# Altium PCB Pulse.pcbdoc
Units mil, origin at the board's own origin, x right, y up, seen from the top; angles counter-clockwise.
Board outline 2386.2 x 1989.53 mil, 4 copper layers (Top Layer, GND, VDD3V3, Bottom Layer), stack 38.584 mil thick; 69 components, 63 nets, 307 pads, 147 vias.
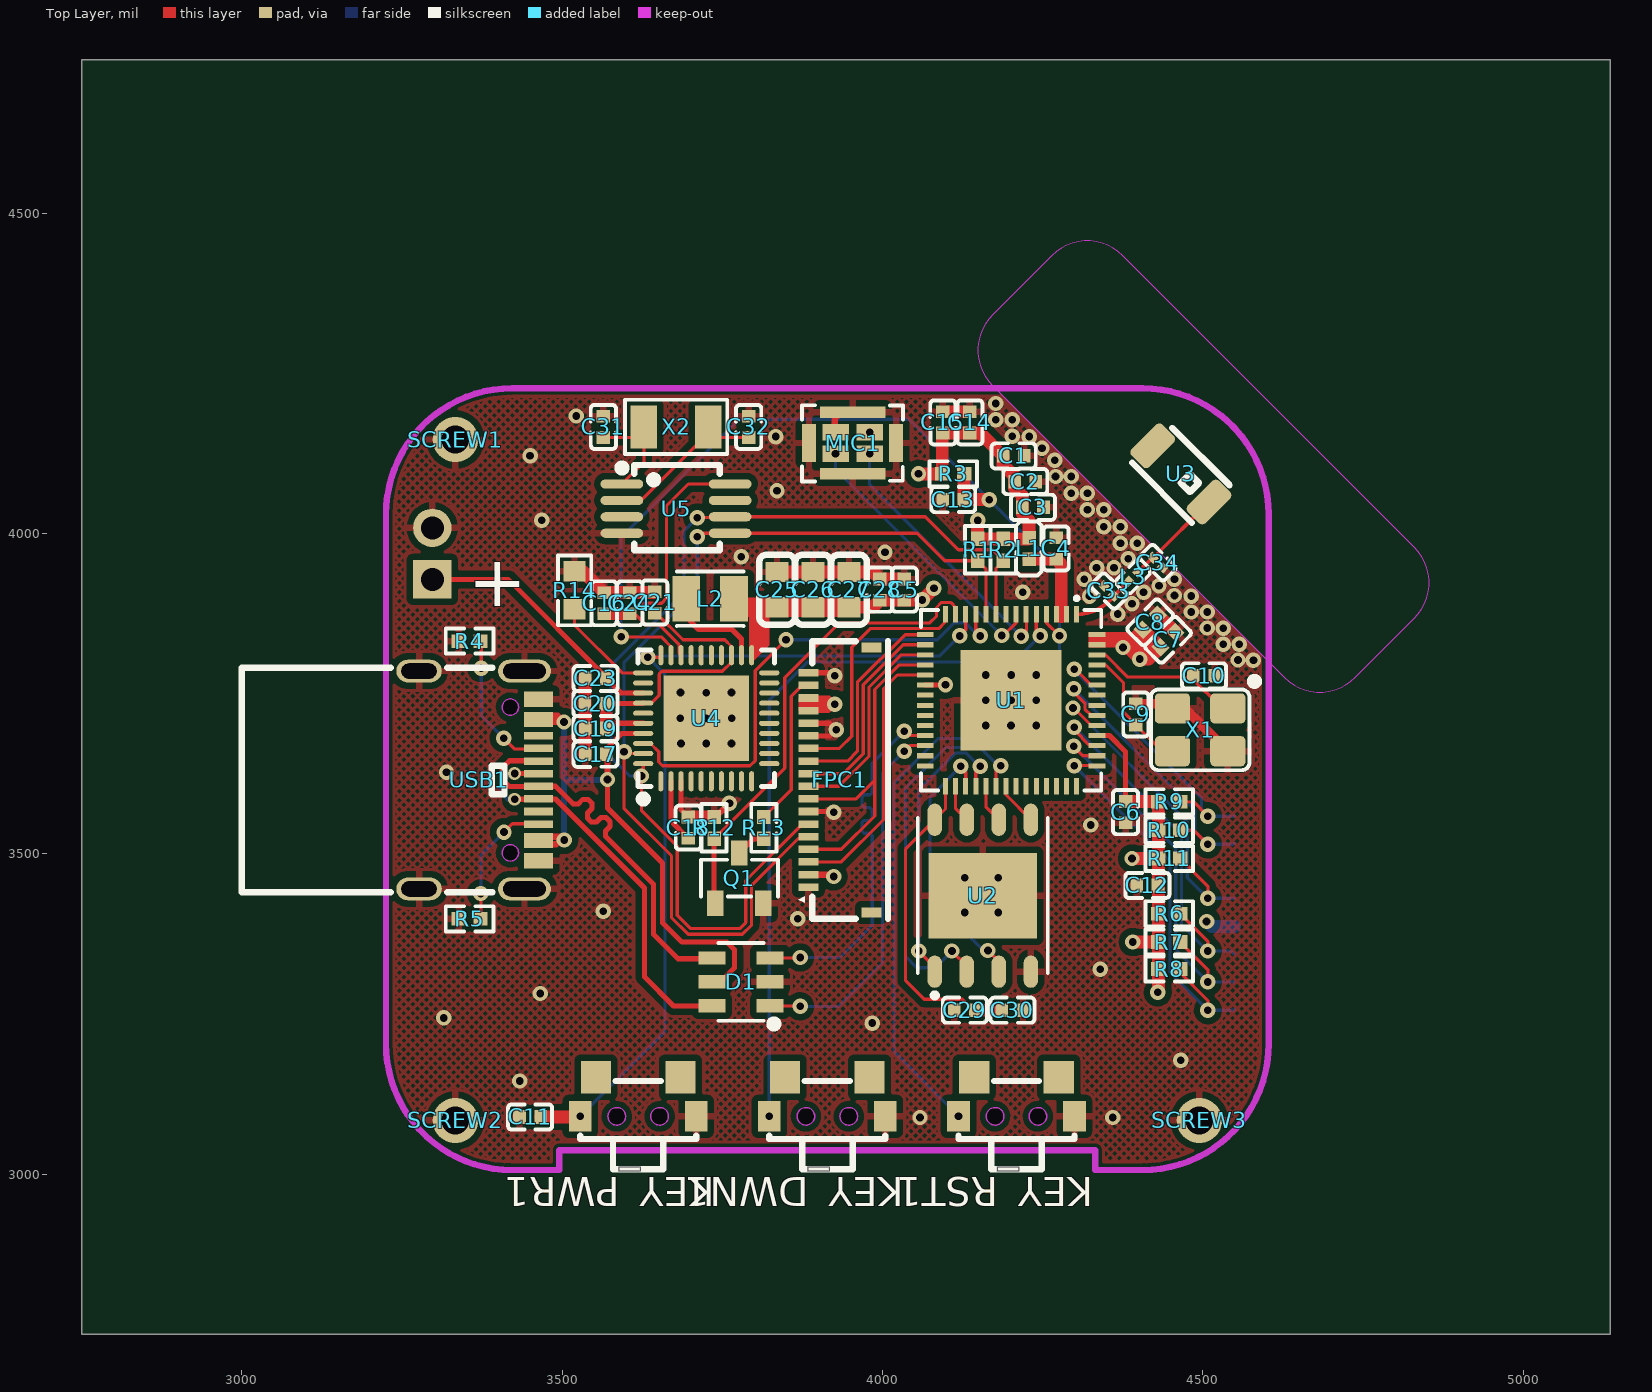
[diagram p0: Top Layer view]
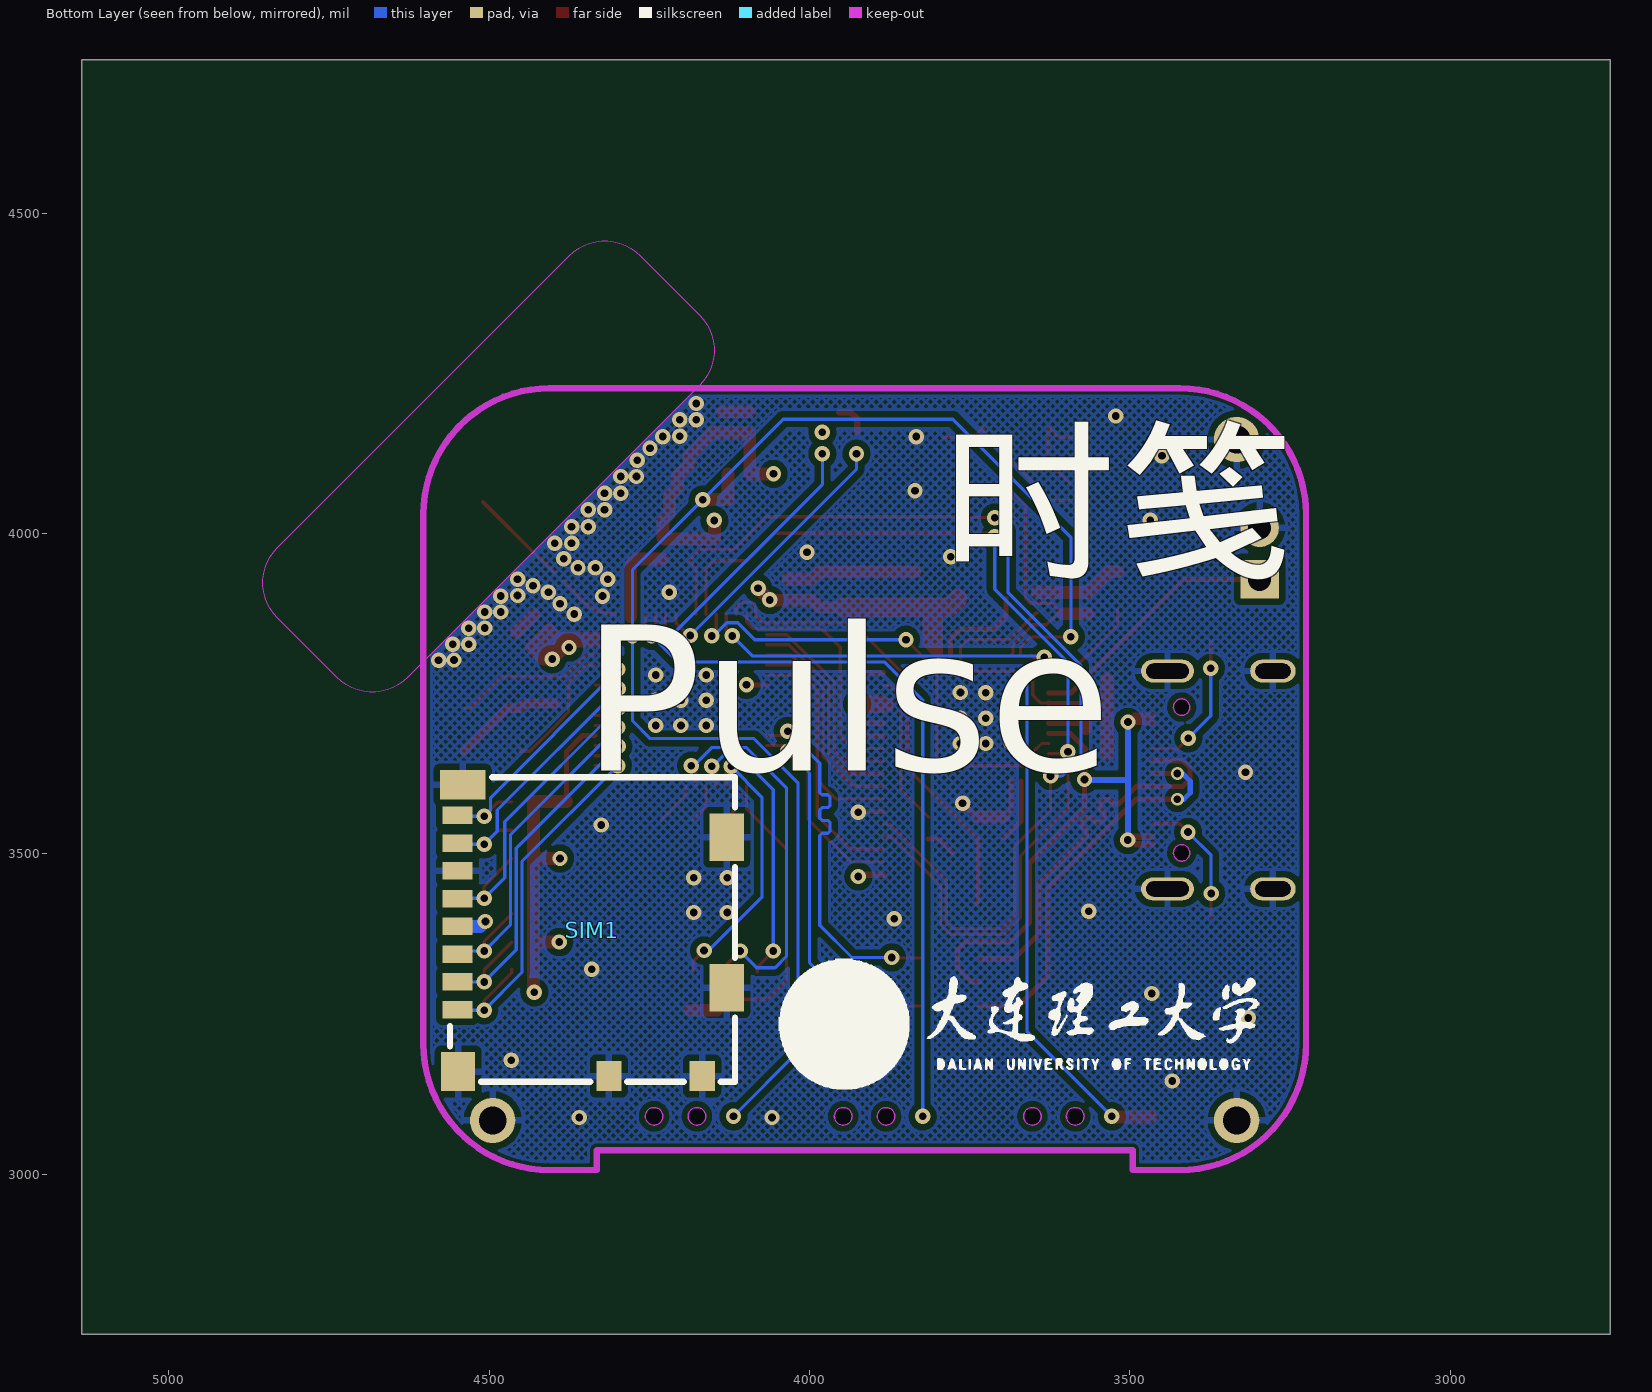
[diagram p1: Bottom Layer view, seen from below]
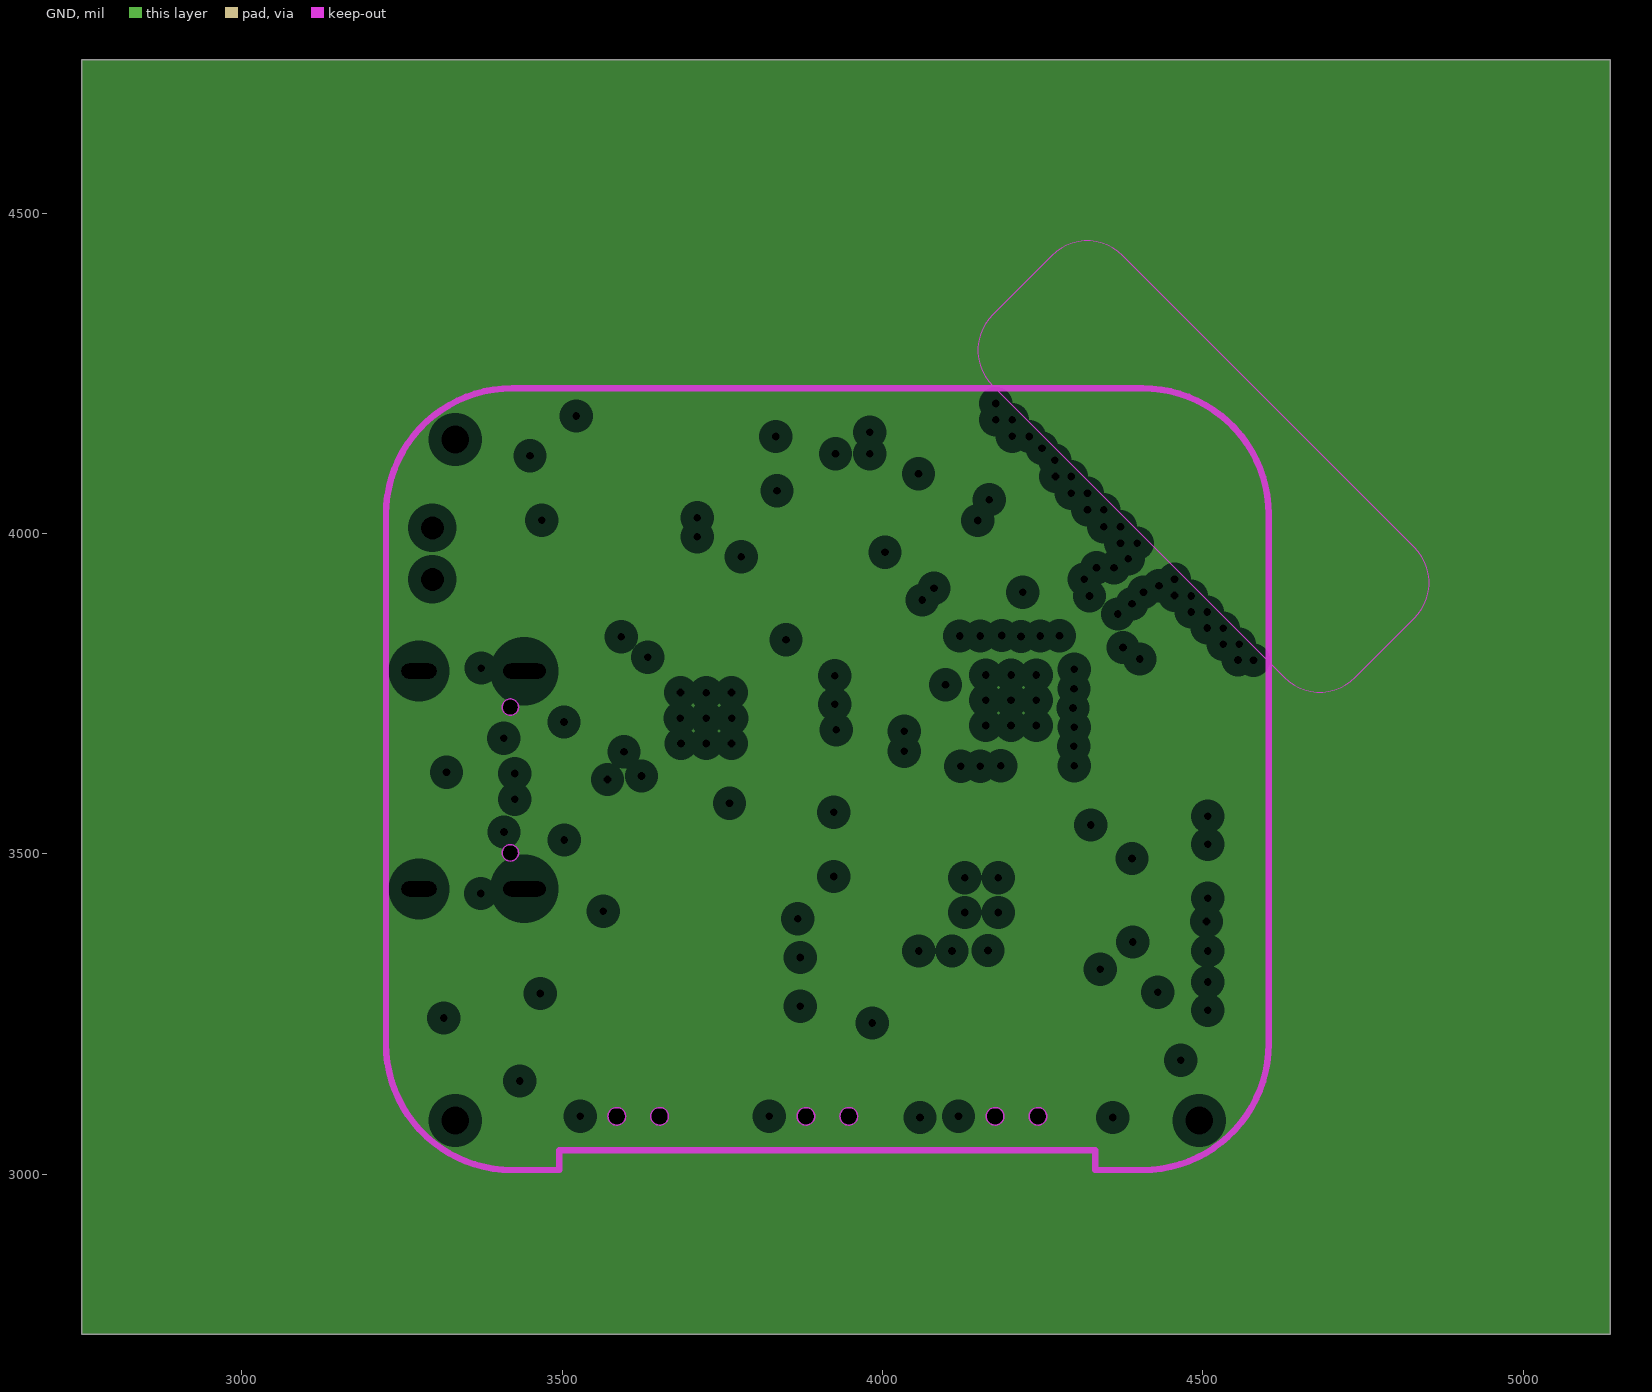
[diagram p2: GND, clearances drawn from the general rule]
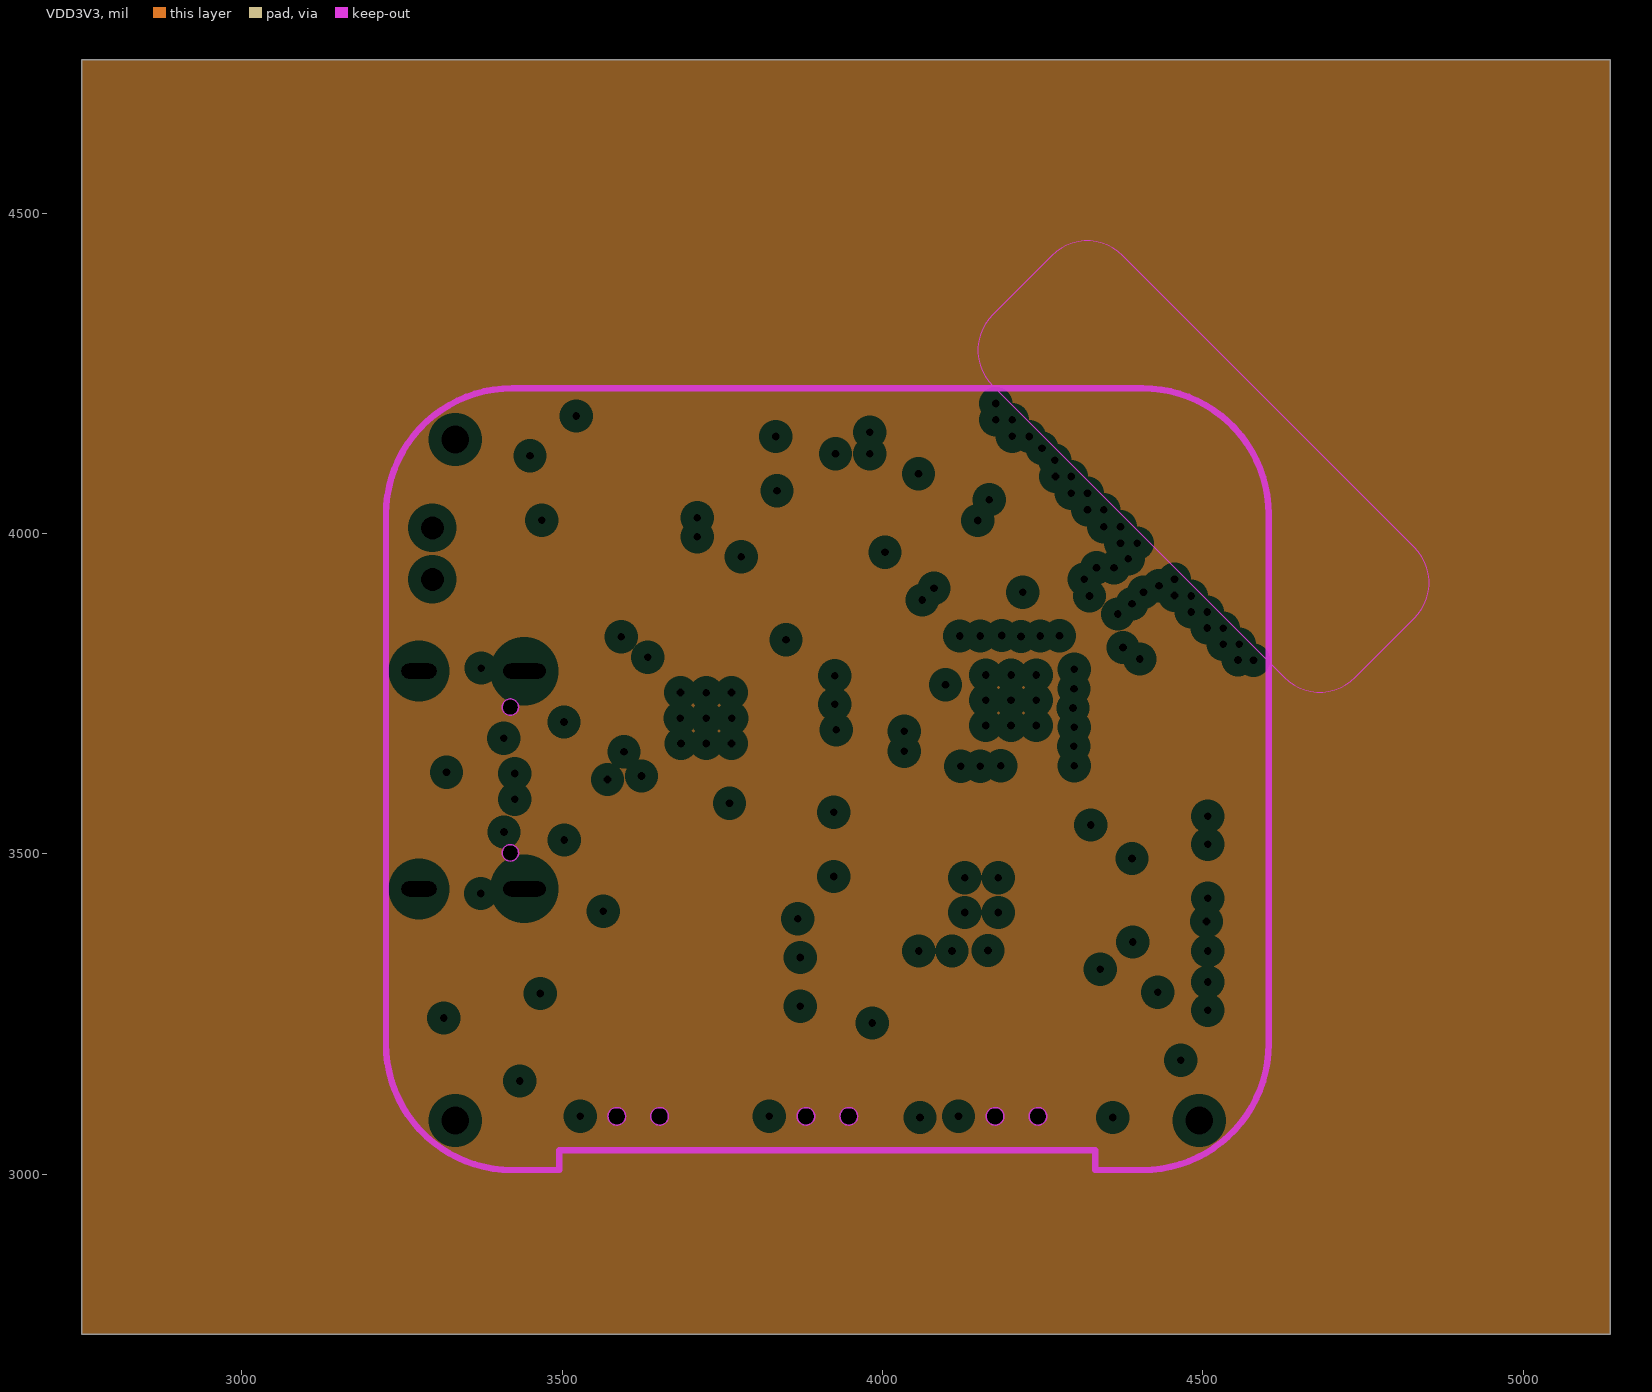
[diagram p3: VDD3V3, clearances drawn from the general rule]

## Layer stack, top to bottom
Top Solder Mask Layer: solder mask 0.394, Dk 0
Top Layer: signal copper 1.378
Dielectric1: surface 11.024, 3313 RC57% 4.2mil, Dk 0
GND: plane copper 1.378
Dielectric2: surface 11.024, 1.3mm H/HOZ Copper, Dk 0
VDD3V3: plane copper 1.378
Dielectric3: surface 11.024, 3313 RC57% 4.2mil, Dk 0
Bottom Layer: signal copper 1.378
Bottom Solder Mask Layer: solder mask 0.394, Dk 0

## Board outline
5136.2,2750 2750,2750 2750,4739.53 5136.2,4739.53

## Design rules (kind name [scope] priority, off if disabled: settings)
BoardOutlineClearance copperThickness1oz [All] p0: genericclearance=10 ignorepadtopadclearanceinfootprint=FALSE except(0: Arc-SplitContinuation Track-SplitContinuation SMDPad-SplitContinuation THPad-SplitContinuation Via-SplitContinuation Fill-SplitContinuation Poly-SplitContinuation Region-SplitContinuation Text-SplitContinuation)
BoardOutlineClearance copperThickness2oz [All] p0: genericclearance=10 ignorepadtopadclearanceinfootprint=FALSE except(0: Arc-SplitContinuation Track-SplitContinuation SMDPad-SplitContinuation THPad-SplitContinuation Via-SplitContinuation Fill-SplitContinuation Poly-SplitContinuation Region-SplitContinuation Text-SplitContinuation)
BoardOutlineClearance otherClearance [All] p0: genericclearance=10 ignorepadtopadclearanceinfootprint=FALSE except(0: Arc-SplitContinuation Track-SplitContinuation SMDPad-SplitContinuation THPad-SplitContinuation Via-SplitContinuation Fill-SplitContinuation Poly-SplitContinuation Region-SplitContinuation Text-SplitContinuation)
Clearance copperThickness1oz [All] p1: gap=7 ignorepadtopadclearanceinfootprint=FALSE
Clearance copperThickness2oz [All] p1: gap=7 ignorepadtopadclearanceinfootprint=FALSE
Clearance otherClearance [All] p1: gap=7 ignorepadtopadclearanceinfootprint=FALSE
DiffPairsRouting differentialPair [All] p1: maxuncoupledlength=10 minlimit=6 maxlimit=Infinity mostfreqgap=6 toplayer_minwidth=5 toplayer_prefwidth=10 toplayer_maxwidth=100 bottomlayer_minwidth=5 bottomlayer_prefwidth=10 bottomlayer_maxwidth=100
PasteMaskExpansion pasteMaskExpansion [All] p1: expansion=0
PlaneConnect innerPlane [All] p1: planeconnectstyle=Relief reliefexpansion=20 reliefentries=4 reliefconductorwidth=10 reliefairgap=10
PolygonConnect copperRegion [All] p1: connectstyle=Relief reliefentries=4 reliefconductorwidth=10 polygonreliefangle="90 Angle" airgapwidth=10
RoutingVias viaSize [All] p1: viastyle="Through Hole" holewidth=12.0078 minholewidth=11.811 maxholewidth=248.0314 width=12.0078 minwidth=11.811 maxwidth=248.0314
SolderMaskExpansion solderMaskExpansion [IsVia] p1: useseparateexpansions=TRUE expansion=-1000 expansionbottom=-1000
SolderMaskExpansion solderMaskExpansion [All] p2: useseparateexpansions=TRUE expansion=2 expansionbottom=2
Width copperThickness1oz [All] p1: maxlimit=100 minlimit=5 preferedwidth=10
Width copperThickness2oz [All] p1: maxlimit=100 minlimit=8 preferedwidth=10

## Components (designator, comment, footprint, x,y, rotation, side; value= is the part's Value field where it differs from the comment)
C1 "10uF" C0402 4204.84,4121.12 r180 top
C2 "1uF" C0402 4222.92,4080.96 r180 top
C3 "100nF" C0402 4234.96,4040.81 r180 top
C4 "100nF" C0402 4271.1,3976.55 r270 top
C5 "100nF" C0402 4034.18,3912.3 r270 top
C6 "100nF" C0402 4379.53,3564.94 r90 top
C7 "1uF" C0402 4445.79,3833.99 r225 top
C8 "10nF" C0402 4418.21,3861.28 r225 top
C9 "22pF" C0402 4395.59,3717.54 r90 top
C10 "22pF" C0402 4502.01,3777.77 r180 top
C11 "100nF" C0402 3449.88,3089.07 r0 top
C12 "100nF" C0402 4413.66,3450.49 r0 top
C13 "100nF" C0402 4110.47,4052.85 r0 top
C14 "10uF" C0402 4136.58,4173.33 r270 top
C15 "100nF" C0402 4094.41,4173.33 r270 top
C16 "100nF" C0402 3565.49,3891.06 r270 top
C17 "10uF" C0402 3552.29,3655.29 r0 top
C18 "1uF" C0402 3696.85,3540.84 r270 top
C19 "1uF" C0402 3552.29,3695.45 r0 top
C20 "1uF" C0402 3551.87,3734.4 r0 top
C21 "1uF" C0402 3644.65,3892.22 r270 top
C23 "1uF" C0402 3552.29,3773.76 r0 top
C24 "1uF" C0402 3605.65,3891.06 r270 top
C25 "22uF" C0603 3835.4,3912.3 r270 top
C26 "22uF" C0603 3891.62,3912.3 r270 top
C27 "22uF" C0603 3947.84,3912.3 r270 top
C28 "100nF" C0402 3996.03,3912.3 r270 top
C29 "100nF" C0402 4128.55,3255.73 r0 top
C30 "1uF" C0402 4202.84,3255.73 r180 top
C31 "18pF" C0402 3564.33,4166.32 r270 top
C32 "18pF" C0402 3791.22,4166.32 r270 top
C33 "1.2pF" C0201 4353.43,3910.29 r315 top
C34 "1.8pF" C0201 4429.73,3954.47 r135 top
D1 "" SOT-23-6_L2.9-W1.6-P0.95-LS2.8-BL 3779.18,3299.9 r90 top
FPC1 "HC-FPC-05-09-18RLTAG" FPC-SMD_18P-P0.50_HC-FPC-05-09-18RLTAG 3933.66,3615.14 r270 top
KEY_DWN1 "TS24CA" SW-SMD_TS24CA 3913.98,3120.56 r180 top
KEY_PWR1 "TS24CA" SW-SMD_TS24CA 3618.7,3120.56 r180 top
KEY_RST1 "TS24CA" SW-SMD_TS24CA 4209.25,3120.56 r180 top
L1 "2nH" L0402 4228.94,3976.55 r270 top
L2 "1uH" IND-SMD_L2.5-W2.0_WPN252012H 3730.99,3898.25 r0 top
L3 "2.4nH" L0201 4391.58,3932.38 r225 top
MIC1 "MSM261D4030H1CPM" MIC-SMD_8P-L4.0-W3.0_ZTS6231 3953.35,4141.2 r90 top
Q1 "AO3400A" SOT-23-3_L2.9-W1.3-P1.90-LS2.4-BR 3776.62,3461.99 r270 top
R1 "4.7kΩ" R0402 4148.62,3974.55 r90 top
R2 "4.7kΩ" R0402 4188.78,3974.55 r90 top
R3 "10kΩ" R0402 4110.47,4093.01 r180 top
R4 "" R0402 3355.51,3831.99 r180 top
R5 "" R0402 3355.51,3398.29 r180 top
R6 "10kΩ" R0402 4447.8,3406.32 r180 top
R7 "10kΩ" R0402 4447.8,3362.14 r180 top
R8 "10kΩ" R0402 4447.8,3319.98 r180 top
R9 "10kΩ" R0402 4447.8,3581 r180 top
R10 "10kΩ" R0402 4447.8,3536.83 r180 top
R11 "10kΩ" R0402 4447.8,3492.66 r180 top
R12 "10kΩ" R0402 3737.16,3540.47 r270 top
R13 "10Ω" R0402 3814.77,3540.3 r90 top
R14 "NCP18XH103F03RB" R0603 3519.31,3911.14 r270 top
SCREW1 "" M1螺丝孔 3333.27,4146.63 r0 top
SCREW2 "" M1螺丝孔 3333.28,3083.64 r0 top
SCREW3 "" M1螺丝孔 4494.67,3083.64 r0 top
SIM1 "SDCARD-1" SIM-SMD_8P-1040310811 4339.37,3380.21 r270 bottom
U1 "ESP32-S3R8" QFN-56_L7.0-W7.0-P0.40-TL-EP4.0 4200.83,3739.62 r270 top
U2 "W25Q128JVPIQ" WSON-8_L6.0-W5.0-P1.27-BL-EP 4156.66,3434.43 r0 top
U3 "ANT3216LL00R2400A" ANT-SMD_L3.2-W1.6 4465.87,4093.01 r135 top
U4 "AXP2101" QFN-40_L5.0-W5.0-P0.40-TL-EP3.4 3724.96,3711.51 r90 top
U5 "BM8563EMA" MSOP-8_L3.0-W3.0-P0.65-LS5.0-BL 3677.76,4038.8 r270 top
USB1 "MC-121-L119" USB-C-SMD_HANBO_MC-121-L119 3370,3615.14 r270 top
X1 "40MHz" OSC-SMD_4P-L3.2-W2.5-BL_SIT8008BI 4495.99,3693.44 r180 top
X2 "32.768kHz" CRYSTAL-SMD_L3.2-W1.5-1 3677.76,4166.32 r180 top

## Footprints (in the part's own frame and the unit in brackets; to place one, negate y for a bottom-side part, rotate by r counter-clockwise, add the part's x,y. Pads: shape width x height; smd on the part's side, far side on the other; paste and mask are expansions set on the pad)
ANT-SMD_L3.2-W1.6 [mil]
  rrect40% 39.4x68.9 smd paste+0 mask+2: 1(-62.1,0) 2(62.1,0)
  silkscreen extent -66,-41 66,42
C0201 [mil]
  rect 14.51x12.76 smd paste-3937.01 mask+2: 1(-10.8,0) 2(10.8,0)
  silkscreen extent -27,-15 27,15
C0402 [mm]
  rect 0.5x0.54 smd: 1(-0.42,0) 2(0.42,0)
  silkscreen extent -0.87,-0.5 0.87,0.5
C0603 [mm]
  rect 0.8x0.9 smd: 1(-0.7,0) 2(0.7,0)
  silkscreen extent -1.39,-0.71 1.39,0.71
CRYSTAL-SMD_L3.2-W1.5-1 [mm]
  rect 1.05x1.7 smd: 1(-1.275,0) 2(1.275,0)
  silkscreen extent -2.03,-1.08 2.03,1.08
FPC-SMD_18P-P0.50_HC-FPC-05-09-18RLTAG [mm]
  rect 0.3x0.8 smd paste+0 mask+0.05: 1(4.25,-1.25) 2(3.75,-1.25) 3(3.25,-1.25) 4(2.75,-1.25) 5(2.25,-1.25) 6(1.75,-1.25) 7(1.25,-1.25) 8(0.75,-1.25) 9(0.25,-1.25) 10(-0.25,-1.25) 11(-0.75,-1.25) 12(-1.25,-1.25) 13(-1.75,-1.25) 14(-2.25,-1.25) 15(-2.75,-1.25) 16(-3.25,-1.25) 17(-3.75,-1.25) 18(-4.25,-1.25)
  rect 0.4x0.8 smd paste+0 mask+0.05: 19(-5.25,1.25) 20(5.25,1.25)
  silkscreen extent -5.5,-1.65 5.5,1.91
IND-SMD_L2.5-W2.0_WPN252012H [mm]
  rect 1.1x1.8 smd: 1(-0.95,0) 2(0.95,0)
  silkscreen extent -1.33,-1.09 1.33,1.09
L0201 [mil]
  rect 14.51x12.76 smd paste-3937.01 mask+2: 1(-10.8,0) 2(10.8,0)
  silkscreen extent -27,-15 27,15
L0402 [mm]
  rect 0.54x0.54 smd: 1(-0.42,0) 2(0.42,0)
  silkscreen extent -1.07,-0.51 1.07,0.49
M1螺丝孔 [mm]
  round 1.8 hole 1.1 copper offset 0,0 paste+0 mask+0.051: 1(0,0)
MIC-SMD_8P-L4.0-W3.0_ZTS6231 [mm]
  rect 0.65x1.05 smd paste+0 mask+0.05: 1(0.425,-0.675) 2(0.425,0.675) 3(-0.425,0.675) 4(-0.425,-0.675)
  rect 1.5x0.55 smd paste+0 mask+0.05: 5(-0.001,-1.726) 7(-0.001,1.726)
  rect 0.45x2.6 smd paste+0 mask+0.05: 6(1.226,0.001) 8(-1.226,0.001)
  silkscreen extent -1.52,-2 1.5,2
MSOP-8_L3.0-W3.0-P0.65-LS5.0-BL [mil]
  oval 14.33x66.61 smd: 1(-38.39,-84.49) 2(-12.79,-84.49) 3(12.8,-84.49) 4(38.39,-84.49) 5(38.39,84.49) 6(12.8,84.49) 7(-12.79,84.49) 8(-38.39,84.49)
  silkscreen extent -69,-90 65,68
OSC-SMD_4P-L3.2-W2.5-BL_SIT8008BI [mm]
  rrect30% 1.4x1.2 smd paste+0 mask+0.051: 1(-1.1,-0.85) 2(1.1,-0.85) 3(1.1,0.85) 4(-1.1,0.85)
  silkscreen extent -2.3,-2.07 1.96,1.6
QFN-40_L5.0-W5.0-P0.40-TL-EP3.4 [mm]
  oval 0.8x0.2 smd paste-100 mask+0.05: 1(-2.5,1.8) 2(-2.5,1.4) 3(-2.5,1) 4(-2.5,0.6) 5(-2.5,0.2) 6(-2.5,-0.2) 7(-2.5,-0.6) 8(-2.5,-1) 9(-2.5,-1.4) 10(-2.5,-1.8) 21(2.5,-1.8) 22(2.5,-1.4) 23(2.5,-1) 24(2.5,-0.6) 25(2.5,-0.2) 26(2.5,0.2) 27(2.5,0.6) 28(2.5,1) 29(2.5,1.4) 30(2.5,1.8)
  oval 0.2x0.8 smd paste-100 mask+0.05: 11(-1.8,-2.5) 12(-1.4,-2.5) 13(-1,-2.5) 14(-0.6,-2.5) 15(-0.2,-2.5) 16(0.2,-2.5) 17(0.6,-2.5) 18(1,-2.5) 19(1.4,-2.5) 20(1.8,-2.5) 31(1.8,2.5) 32(1.4,2.5) 33(1,2.5) 34(0.6,2.5) 35(0.2,2.5) 36(-0.2,2.5) 37(-0.6,2.5) 38(-1,2.5) 39(-1.4,2.5) 40(-1.8,2.5)
  rect 3.4x3.4 smd paste-100 mask+0.05: 41(0,0)
  silkscreen extent -3.35,-2.7 2.7,2.7
QFN-56_L7.0-W7.0-P0.40-TL-EP4.0 [mm]
  rect 0.665x0.2 smd paste-100 mask+0.051: 1(-3.408,2.6) 2(-3.408,2.2) 3(-3.408,1.8) 4(-3.408,1.4) 5(-3.408,1) 6(-3.408,0.6) 7(-3.408,0.2) 8(-3.408,-0.2) 9(-3.408,-0.6) 10(-3.408,-1) 11(-3.408,-1.4) 12(-3.408,-1.8) 13(-3.408,-2.2) 14(-3.408,-2.6) 29(3.408,-2.6) 30(3.408,-2.2) 31(3.408,-1.8) 32(3.408,-1.4) 33(3.408,-1) 34(3.408,-0.6) 35(3.408,-0.2) 36(3.408,0.2) 37(3.408,0.6) 38(3.408,1) 39(3.408,1.4) 40(3.408,1.8) 41(3.408,2.2) 42(3.408,2.6)
  rect 0.2x0.665 smd paste-100 mask+0.051: 15(-2.6,-3.408) 16(-2.2,-3.408) 17(-1.8,-3.408) 18(-1.4,-3.408) 19(-1,-3.408) 20(-0.6,-3.408) 21(-0.2,-3.408) 22(0.2,-3.408) 23(0.6,-3.408) 24(1,-3.408) 25(1.4,-3.408) 26(1.8,-3.408) 27(2.2,-3.408) 28(2.6,-3.408) 43(2.6,3.408) 44(2.2,3.408) 45(1.8,3.408) 46(1.4,3.408) 47(1,3.408) 48(0.6,3.408) 49(0.2,3.408) 50(-0.2,3.408) 51(-0.6,3.408) 52(-1,3.408) 53(-1.4,3.408) 54(-1.8,3.408) 55(-2.2,3.408) 56(-2.6,3.408)
  rect 4x4 smd paste-100 mask+0.051: 57(0,0)
  silkscreen extent -4.11,-3.58 3.58,3.58
R0402 [mm]
  rect 0.566x0.54 smd paste-100 mask+0.051: 1(-0.433,0) 2(0.433,0)
  silkscreen extent -0.94,-0.5 0.94,0.5
R0603 [mil]
  rect 31.75x34.02 smd paste-3937.01 mask+2: 1(-29.66,0) 2(29.66,0)
  silkscreen extent -55,-26 55,26
SIM-SMD_8P-1040310811 [mm]
  rect 0.7x1.2 smd: 1(3.138,-5.337) 2(2.037,-5.337) 3(0.938,-5.337) 4(-0.162,-5.337) 5(-1.263,-5.337) 6(-2.363,-5.337) 7(-3.462,-5.337) 8(-4.562,-5.337)
  rect 1.17x1.8 smd: 9(-5.773,-5.138)
  rect 1.55x1.35 smd: 10(5.598,-5.313)
  rect 1.2x1 smd: 11(5.773,0.663) 12(5.773,4.363)
  rect 1.9x1.35 smd: 13(2.273,5.337) 14(-3.697,5.337)
  silkscreen extent -6.07,-5.64 5.99,5.67
SOT-23-3_L2.9-W1.3-P1.90-LS2.4-BR [mm]
  rect 1x0.65 smd: 1(1,-0.95) 2(1,0.95) 3(-1,0)
  silkscreen extent -0.73,-1.53 0.73,1.53
SOT-23-6_L2.9-W1.6-P0.95-LS2.8-BL [mil]
  rect 20.95x42.2 smd: 1(-37.4,-45.24) 2(0,-45.24) 3(37.4,-45.24) 4(37.4,45.24) 5(0,45.24) 6(-37.4,45.24)
  silkscreen extent -72,-57 61,35
SW-SMD_TS24CA [mm]
  rect 0.9x1.2 smd: 1(2.3,0.775) 2(-2.3,0.775)
  rect 1.2x1.3 smd: 3(1.675,-0.775) 4(-1.675,-0.775)
  Board Outline Layer circle w0.003: c0.85,0.775 r0.35
  Board Outline Layer circle w0.003: c-0.85,0.775 r0.35
  Board Outline Layer region: 0.5,0.775 0.535,0.927 0.632,1.049 0.772,1.116 0.928,1.116 1.068,1.049 1.165,0.927 1.2,0.775 1.2,0.775 1.165,0.623 1.068,0.501 0.928,0.434 0.772,0.434 0.632,0.501 0.535,0.623 0.5,0.775
  Board Outline Layer region: 0.5,0.775 0.509,0.853 0.535,0.927 0.576,0.993 0.632,1.049 0.698,1.09 0.772,1.116 0.85,1.125 0.928,1.116 1.002,1.09 1.068,1.049 1.124,0.993 1.165,0.927 1.191,0.853 1.2,0.775 1.191,0.697 1.165,0.623 1.124,0.557 1.068,0.501 1.002,0.46 0.928,0.434 0.85,0.425 0.772,0.434 0.698,0.46 0.632,0.501 0.576,0.557 0.535,0.623 0.509,0.697
  Board Outline Layer region: -1.2,0.775 -1.165,0.927 -1.068,1.049 -0.928,1.116 -0.772,1.116 -0.632,1.049 -0.535,0.927 -0.5,0.775 -0.5,0.775 -0.535,0.623 -0.632,0.501 -0.772,0.434 -0.928,0.434 -1.068,0.501 -1.165,0.623 -1.2,0.775
  Board Outline Layer region: -1.2,0.775 -1.191,0.853 -1.165,0.927 -1.124,0.993 -1.068,1.049 -1.002,1.09 -0.928,1.116 -0.85,1.125 -0.772,1.116 -0.698,1.09 -0.632,1.049 -0.576,0.993 -0.535,0.927 -0.509,0.853 -0.5,0.775 -0.509,0.697 -0.535,0.623 -0.576,0.557 -0.632,0.501 -0.698,0.46 -0.772,0.434 -0.85,0.425 -0.928,0.434 -1.002,0.46 -1.068,0.501 -1.124,0.557 -1.165,0.623 -1.191,0.697
  Multi-Layer board cut-out: 0.5,0.775 0.535,0.927 0.632,1.049 0.772,1.116 0.928,1.116 1.068,1.049 1.165,0.927 1.2,0.775 1.2,0.775 1.165,0.623 1.068,0.501 0.928,0.434 0.772,0.434 0.632,0.501 0.535,0.623 0.5,0.775
  Multi-Layer board cut-out: -1.2,0.775 -1.165,0.927 -1.068,1.049 -0.928,1.116 -0.772,1.116 -0.632,1.049 -0.535,0.927 -0.5,0.775 -0.5,0.775 -0.535,0.623 -0.632,0.501 -0.772,0.434 -0.928,0.434 -1.068,0.501 -1.165,0.623 -1.2,0.775
  silkscreen extent -2.3,-0.62 2.3,2.88
USB-C-SMD_HANBO_MC-121-L119 [mm]
  oval 0.9x2.1 hole 0.6 slot 1.7 at 90 deg: 13(-4.32,1.807) 13(4.32,1.807)
  oval 0.9x1.8 hole 0.6 slot 1.4 at 90 deg: 13(-4.32,-2.373) 13(4.32,-2.373)
  rect 0.6x1.15 smd paste-100 mask+0.051: A1B12(-3.2,2.372) A4B9(-2.4,2.372) B1A12(3.2,2.372) B4A9(2.4,2.372)
  rect 0.3x1.15 smd paste-100 mask+0.051: A5(-1.25,2.372) A6(-0.25,2.372) A7(0.25,2.372) A8(1.25,2.372) B5(1.75,2.372) B6(0.75,2.372) B7(-0.75,2.372) B8(-1.75,2.372)
  Board Outline Layer circle w0.003: c2.89,1.248 r0.325
  Board Outline Layer circle w0.003: c-2.89,1.248 r0.325
  Board Outline Layer region: 2.89,1.573 3.031,1.54 3.144,1.45 3.207,1.32 3.207,1.175 3.144,1.045 3.031,0.955 2.89,0.923 2.89,0.923 2.749,0.955 2.636,1.045 2.573,1.175 2.573,1.32 2.636,1.45 2.749,1.54 2.89,1.573
  Board Outline Layer region: 2.89,1.573 2.968,1.563 3.041,1.535 3.105,1.491 3.157,1.432 3.194,1.363 3.213,1.287 3.213,1.208 3.194,1.132 3.157,1.063 3.105,1.004 3.041,0.96 2.968,0.932 2.89,0.923 2.812,0.932 2.739,0.96 2.674,1.004 2.622,1.063 2.586,1.132 2.567,1.208 2.567,1.287 2.586,1.363 2.622,1.432 2.674,1.491 2.739,1.535 2.812,1.563
  Board Outline Layer region: -2.89,1.573 -2.749,1.54 -2.636,1.45 -2.573,1.32 -2.573,1.175 -2.636,1.045 -2.749,0.955 -2.89,0.923 -2.89,0.923 -3.031,0.955 -3.144,1.045 -3.207,1.175 -3.207,1.32 -3.144,1.45 -3.031,1.54 -2.89,1.573
  Board Outline Layer region: -2.89,1.573 -2.812,1.563 -2.739,1.535 -2.675,1.491 -2.623,1.432 -2.586,1.363 -2.568,1.287 -2.568,1.208 -2.586,1.132 -2.623,1.063 -2.675,1.004 -2.739,0.96 -2.812,0.932 -2.89,0.923 -2.968,0.932 -3.041,0.96 -3.106,1.004 -3.158,1.063 -3.194,1.132 -3.213,1.208 -3.213,1.287 -3.194,1.363 -3.158,1.432 -3.106,1.491 -3.041,1.535 -2.968,1.563
  Multi-Layer board cut-out: 2.89,1.573 3.031,1.54 3.144,1.45 3.207,1.32 3.207,1.175 3.144,1.045 3.031,0.955 2.89,0.923 2.89,0.923 2.749,0.955 2.636,1.045 2.573,1.175 2.573,1.32 2.636,1.45 2.749,1.54 2.89,1.573
  Multi-Layer board cut-out: -2.89,1.573 -2.749,1.54 -2.636,1.45 -2.573,1.32 -2.573,1.175 -2.636,1.045 -2.749,0.955 -2.89,0.923 -2.89,0.923 -3.031,0.955 -3.144,1.045 -3.207,1.175 -3.207,1.32 -3.144,1.45 -3.031,1.54 -2.89,1.573
  silkscreen extent -4.45,-9.4 4.44,1.02
WSON-8_L6.0-W5.0-P1.27-BL-EP [mm]
  oval 0.581x1.276 smd: 1(-1.905,-3.013) 2(-0.635,-3.013) 3(0.635,-3.013) 4(1.905,-3.013) 5(1.905,3.013) 6(0.635,3.013) 7(-0.635,3.013) 8(-1.905,3.013)
  rect 4.3x3.4 smd: 9(0,0)
  silkscreen extent -2.58,-4.05 2.58,3.08

## Free pads (board coordinates)
  rect 60x60 hole 36: 1(3297.29,3928.36)
  round 60 hole 36: 1(3297.29,4008.68)

## Via types
v1: diameter 24.02, hole 12, Top Layer to Bottom Layer, 136 vias
v2: diameter 24, hole 12, Top Layer to Bottom Layer, 9 vias
v3: diameter 20, hole 12, Top Layer to Bottom Layer, 2 vias

## Nets (pads, with @x,y where several pads share a name; then routed paths per layer and width w, separated by ;. In a path a pad name is that pad's centre, name@x,y a point inside that pad or via, vN(x,y) a via of type N, cw(c..) or ccw(c..) an arc to the next point about the centre after c; other vN are vias at no path point)
$1N33: C33.2 L3.2 U1.1 | length 99.1
  Top Layer w6.2: U1.1 ccw(c4303.19,3946.2) C33.2 4383.15,3924.74 L3.2
$1N72: C4.2 L1.2 U1.2 U1.3 | length 135.4
  Top Layer w20: L1.2 C4.2 4279.14,3951.98 4279.14,3870.14
$1N124: C34.2 L3.1 U3.1 | length 155.7
  Top Layer w6.2: L3.1 4421.3,3962.1 C34.2 4422.78,3962.1 U3.1
$1N184: C32.2 U5.2 X2.1 | length 258.2
  Top Layer w5: U5.2 3623.3,4051.59 3727.95,4156.24 X2.1 3744.5,4149.78 C32.2
$1N185: C31.2 U5.1 X2.2 | length 173.4
  Top Layer w5: C31.2 3611.02,4149.78 X2.2 3627.56,4111.48 U5.1
$1N198: L2.1 U4.22 | length 154.7
  Top Layer w8: L2.1 3693.59,3869.39 3712.92,3850.06 3765.12,3850.06 3780.08,3835.1 U4.22
$1N429: Q1.3 R13.1 | length 47.2
  Top Layer w8: Q1.3 3798.52,3523.26 R13.1
$1N464: R5.1 USB1.B5 | length 212.3
  Top Layer w5: R5.1 3373.14,3398.87 v1(3373.14,3437.86) ; v1(3409.18,3533.81) 3422.24,3546.87 3464.45,3546.87 USB1.B5@3465.08,3546.24
  Bottom Layer w5: v1(3373.14,3437.86) 3373.14,3497.76 v1(3409.18,3533.81)
$1N465: R4.1 USB1.A5 | length 230.4
  Top Layer w5: R4.1 3373.58,3830.96 v1(3373.58,3789.82) ; v1(3408.68,3680.41) 3425.76,3663.33 3464.06,3663.33 USB1.A5@3465.08,3664.35
  Bottom Layer w5: v1(3373.58,3789.82) 3373.58,3715.5 v1(3408.68,3680.41)
BAT: C23.2 pad.1@3297.29,3928.36 U4.33 | length 403.7
  Top Layer w8: pad.1@3297.29,3928.36 3415.73,3928.36 3568.83,3775.27 C23.2 3591.7,3750.88 U4.33
ESP_EN: C13.2 KEY_RST1.1 R3.1 U1.4 U4.29 | length 2331
  Top Layer w5: v1(3592.02,3838.53) 3654.87,3838.53 3670.75,3822.66 3670.75,3810.85 U4.29 ; U1.4 4255.95,3860.49 v1@4276.34,3840.1
  Top Layer w20: R3.1 4127.51,4053.35 C13.2 v1(4166.69,4052.85)
  Bottom Layer w5: v1(3592.02,3838.53) 3592.02,3994.2 3776.25,4178.43 4041.12,4178.43 v1(4166.69,4052.85) 4276.43,3943.12 v1(4276.43,3840.1) 4276.43,3707.51 4248.68,3679.77 4086.76,3679.77 4018.11,3611.12 4018.11,3190.64 v1(4118.7,3090.05)
GND: C1.1 C2.1 C3.1 C4.1 C5.1 C6.1 C7.1 C8.1 C9.2 C10.1 C11.1 C12.1 C13.1 C14.1 C15.1 C16.1 C17.1 C18.1 C19.1 C20.1 C21.1 C23.1 C24.1 C25.1 C26.1 C27.1 C28.1 C29.1 C30.1 C31.1 C32.1 C33.1 C34.1 D1.2 FPC1.1 FPC1.7 FPC1.13 FPC1.14 FPC1.18 KEY_DWN1.2 KEY_PWR1.2 KEY_RST1.2 MIC1.2 MIC1.5 MIC1.6 MIC1.7 MIC1.8 pad.1@3297.29,4008.68 Q1.2 R4.2 R5.2 R12.1 R14.1 SCREW1.1 SCREW2.1 SCREW3.1 SIM1.6 SIM1.9 SIM1.10 SIM1.11 SIM1.12 SIM1.13 SIM1.14 U1.57 U2.4 U2.9 U4.3 U4.41 U5.4 USB1.13 USB1.A1B12 USB1.B1A12 X1.2 X1.4 | length 1079.2
  Top Layer w5: v1@3922.76,3565.92 v1(3923.74,3564.94)
  Top Layer w8: U4.3 3685.59,3568.65 C18.1 ; FPC1.7 v1@3922.76,3565.92 ; FPC1.13 3918.35,3684.03 v1(3927.76,3693.44) 3917.48,3703.72 FPC1.14 ; FPC1.18 3921.06,3782.46 v1(3925.75,3777.77)
  Top Layer w10: R12.1@3739.62,3557.51 v1(3761.1,3578.99) ; MIC1.2 3925.75,4158.95 3925.75,4179.35 3935.85,4189.45 MIC1.6
  Top Layer w15: C9.2 4445.51,3734.08 X1.2 4472.37,3726.91 X1.4
  Top Layer w20: R14.1 3532.29,3940.8 C16.1 C24.1 3643.49,3907.6 C21.1 ; C17.1 C19.1 C23.1 ; C18.1 3737.03,3557.38 R12.1 ; C25.1 C26.1 C27.1 3985.01,3939.86 C28.1 C5.1 ; C15.1 C14.1 ; C8.1 4457.19,3845.69 C7.1
  other v1: 4058.62,3088.28 4359.55,3088.28 3433.82,3145.29 4465.87,3177.42 3983.98,3235.65 3315.36,3243.68 3465.95,3281.83 4339.87,3319.78 3867.87,3398.56 4128.39,3408.33 4180.75,3408.33 3564.33,3410.33 4128.39,3462.31 4180.91,3462.31 4325.32,3544.86 3319.37,3627.18 3685.41,3672.02 3724.96,3672.02 3764.45,3672.02 3684.42,3711.51 3724.96,3711.51 3764.78,3711.51 3684.81,3751.67 3724.96,3751.5 3764.45,3751.67 4555.15,3802.46 4579.15,3801.87 4532.13,3827.19 4557.16,3827.19 4507.1,3852.37 4532.13,3852.07 4367.48,3874.15 4481.93,3877.31 4507.1,3877.31 4389.57,3890.21 4323.31,3902.26 4481.93,3902.26 4455.83,3903.08 4218.9,3908.29 4407.64,3908.29 4431.73,3918.33 4315.28,3928.36 4455.83,3928.36 4334.3,3946.47 4361.46,3946.44 4383.55,3960.49 3779.79,3963.45 4004.06,3970.53 4371.5,3984.59 4397.6,3984.59 4345.67,4010.69 4371.5,4010.69 3467.95,4020.73 4319.98,4036.91 4345.67,4036.91 4294.62,4062.93 4319.98,4062.93 3835.4,4066.91 4270.25,4088.95 4294.62,4088.95 4269.1,4114.09 3449.88,4121.12 4249.03,4133.16 3833.39,4151.24 4228.94,4151.24 4202.69,4151.62 4176.73,4177.34 4202.69,4177.34 3522.17,4183.36 4176.73,4202.93
  other v2: 4161.45,3700.25 4200.82,3700.25 4240.19,3700.25 4161.47,3739.6 4200.82,3739.62 4240.19,3739.62 4161.45,3778.99 4200.83,3778.98 4240.19,3778.98
GPIO0: KEY_DWN1.1 U1.5 | length 1150.5
  Top Layer w5: U1.5 4240.2,3846.29 v1(4246.44,3840.06)
  Bottom Layer w5: v1(3823.43,3090.05) 3823.43,3739.7 3883.19,3799.46 4205.62,3799.46 4246.22,3840.06 v1(4246.44,3840.06)
GPIO1: MIC1.4 U1.6 | length 421.4
  Top Layer w5: v1(4216.44,3839.26) 4224.92,3847.74 4224.92,3873.31 U1.6
  Bottom Layer w5: v1(3979.94,4124.46) 3979.94,4076.21 4216.44,3839.71 v1(4216.44,3839.26)
GPIO2: MIC1.3 U1.7 | length 435.1
  Top Layer w5: v1(4186.48,3840.69) 4188.89,3840.69 4208.7,3860.5 U1.7
  Bottom Layer w5: v1(3926.76,4124.46) 3926.76,4100.41 v1(4186.48,3840.69)
GPIO3: U1.8
GPIO4: FPC1.6 R2.1 U1.9 U4.40 U5.6 | length 1665.2
  Top Layer w5: U4.40 3626.54,3624.08 v1(3623.76,3621.3) 3623.76,3567.76 3679.77,3511.75 3679.77,3404.03 3700.59,3383.21 3777.45,3383.21 3786.71,3392.47 3786.71,3458.24 3874.71,3546.24 FPC1.6 ; v1(3710.91,4024.74) 3760.99,4024.74 U5.6 4067.05,4026 4118.51,3974.55 4171.74,3974.55 R2.1 4177.21,3945.94 U1.9
  Bottom Layer w5: v1(3623.76,3621.3) 3605.69,3621.3 3576.17,3650.82 3576.17,3793.7 3690.42,3907.95 3690.42,4004.25 v1(3710.91,4024.74)
GPIO5: FPC1.5 R1.1 U1.10 U4.39 U5.5 | length 1573
  Top Layer w5: v1(3596.66,3659.31) v1@3599.58,3656.39 ; U4.39 v1@3599.58,3656.39 ; v1(3710.91,3994.74) 3716.57,4000.41 U5.5 4054.49,4000.41 4097.4,3957.51 R1.1 4161.46,3944.67 U1.10 ; FPC1.5 3871.3,3526.55 3795.72,3450.98 3795.72,3388.73 3781.18,3374.19 3696.85,3374.19 3670.75,3400.29 3670.75,3496.67 3596.46,3570.96 3596.46,3653.28 v1@3599.58,3656.39
  Bottom Layer w5: v1(3596.66,3659.31) 3596.66,3798.84 3710.91,3913.09 v1(3710.91,3994.74)
GPIO6: U1.11 U4.38 | length 769.7
  Top Layer w5: U4.38 3637.84,3672.14 3650.67,3659.31 3650.67,3643.25 3656.69,3637.22 3793.23,3637.22 3801.45,3645.44 3801.45,3785.99 v1(3849.45,3833.99) ; U1.11 4145.71,3846.83 v1(4152.52,3840.02)
  Bottom Layer w5: v1(3849.45,3833.99) 4085.51,3833.99 4112.03,3860.51 4129,3860.51 4149.49,3840.02 v1(4152.52,3840.02)
GPIO7: C11.2 KEY_PWR1.1 U1.12 U4.30 | length 1405.4
  Top Layer w5: v1(3633.5,3806.7) 3650.85,3806.7 U4.30 ; v1(4120.51,3840.02) 4129.96,3849.47 U1.12
  Top Layer w20: C11.2 3527.18,3089.07 v1(3528.15,3090.05)
  Bottom Layer w5: v1(3528.15,3090.05) 3660.71,3222.6 3660.71,3779.5 v1(3633.5,3806.7) 3635.28,3808.48 4088.98,3808.48 v1(4120.51,3840.02)
GPIO8: Q1.1 R12.2 U1.13 | length 736.6
  Top Layer w5: R12.2 3847.44,3633.72 3847.44,3774.89 3932.99,3860.43 4074.15,3860.43 4084.37,3870.65 4084.37,3884.48 4092.26,3892.37 4106.46,3892.37 4114.49,3884.34 4114.49,3874.06 U1.13
  Top Layer w8: R12.2 3737.16,3424.68 Q1.1
GPIO9: FPC1.12 U1.14 | length 388.9
  Top Layer w5: FPC1.12 3932.8,3664.35 3951.93,3683.48 3951.93,3822.28 3981.06,3851.42 4087.74,3851.42 4098.47,3862.15 U1.14
GPIO10: FPC1.11 U1.15 | length 327.1
  Top Layer w5: FPC1.11 3945.84,3644.66 3960.95,3659.77 3960.95,3767.59 4035.33,3841.98 U1.15
GPIO11: FPC1.10 U1.16 | length 328.8
  Top Layer w5: FPC1.10 3938.91,3624.98 3969.96,3656.04 3969.96,3763.86 4032.34,3826.24 U1.16
GPIO12: FPC1.9 U1.17 | length 330.4
  Top Layer w5: FPC1.9 3931.97,3605.29 3978.98,3652.3 3978.98,3760.12 4029.34,3810.49 U1.17
GPIO13: FPC1.4 FPC1.8 U1.18 | length 532.7
  Top Layer w5: FPC1.4 3935.95,3506.87 3987.99,3558.92 3987.99,3614.72 ; FPC1.8 3958.89,3585.61 3987.99,3614.72 ; U1.18 4026.34,3794.74 3987.99,3756.39 3987.99,3614.72
GPIO14: FPC1.3 U1.19 | length 422.7
  Top Layer w5: FPC1.3 3935.79,3487.18 4002.05,3553.44 4002.05,3757.7 4023.34,3778.99 U1.19
GPIO15: U1.21
GPIO16: U1.22
GPIO17: U1.23
GPIO18: U1.24
GPIO19: D1.3 U1.25 | length 587.7
  Top Layer w5: D1.3 3870.79,3337.3 v1(3871.54,3338.05) ; v1(4034.18,3691.44) 4041.11,3684.5 U1.25
  Bottom Layer w5: v1(3871.54,3338.05) 3933.78,3338.05 3983.98,3388.25 3983.98,3528.44 3980.44,3531.98 3971.45,3531.98 3967.92,3535.51 3967.92,3548.44 3971.45,3551.98 3980.44,3551.98 3983.98,3555.51 3983.98,3568.44 3980.44,3571.98 3971.45,3571.98 3967.92,3575.51 3967.92,3588.44 3971.45,3591.98 3980.44,3591.98 3983.98,3595.51 3983.98,3641.24 v1(4034.18,3691.44)
GPIO20: D1.1 U1.26 | length 584.6
  Top Layer w5: D1.1 3870.79,3262.5 v1(3871.54,3261.75) ; v1(4034.18,3660.22) 4042.72,3668.76 U1.26
  Bottom Layer w5: v1(3871.54,3261.75) 3931.77,3261.75 4000.04,3330.02 4000.04,3626.08 v1(4034.18,3660.22)
GPIO21: U1.27
GPIO38: R8.1 SIM1.1 U1.43 | length 628.2
  Top Layer w5: v1(4299.27,3637.58) 4334.66,3637.58 U1.43 ; R8.1 4464.84,3314.12 4508.03,3270.92 v1(4508.03,3255.73)
  Bottom Layer w5: v1(4299.27,3637.58) 4448.86,3487.99 4448.86,3314.9 v1(4508.03,3255.73) 4548.54,3255.73 SIM1.1
GPIO39: R7.1 SIM1.2 U1.44 | length 618.4
  Top Layer w5: v1(4298.82,3667.58) 4304.37,3662.03 4304.37,3661.63 4312.99,3653.01 U1.44 ; R7.1 4508.03,3318.95 v1(4508.03,3299.9)
  Bottom Layer w5: v1(4298.82,3667.58) 4457.88,3508.52 4457.88,3350.06 v1(4508.03,3299.9) 4549.41,3299.9 SIM1.2
GPIO40: R6.1 SIM1.3 U1.45 | length 605.7
  Top Layer w5: v1(4299.21,3697.58) 4299.21,3693.36 4323.81,3668.76 U1.45 ; R6.1 4508.03,3363.12 v1(4508.03,3348.09)
  Bottom Layer w5: v1(4299.21,3697.58) 4466.89,3529.9 4466.89,3389.23 v1(4508.03,3348.09) 4544.72,3348.09 SIM1.3
GPIO41: R11.1 SIM1.5 U1.47 | length 555.3
  Top Layer w5: v1(4297.57,3727.58) 4298.6,3727.58 4325.93,3700.25 U1.47 ; R11.1 4508.03,3449.46 v1(4508.03,3430.41)
  Bottom Layer w5: v1(4297.57,3727.58) 4298.19,3727.58 4475.91,3549.86 4475.91,3462.54 v1(4508.03,3430.41) 4549.02,3430.41 SIM1.5
GPIO42: R10.1 SIM1.7 U1.48 | length 485.8
  Top Layer w5: v1(4298.91,3757.58) 4298.91,3752.41 4316.07,3735.24 4316.07,3725.85 4325.93,3716 U1.48 ; R10.1 4485.95,3536.83 v1(4508.03,3514.74)
  Bottom Layer w5: v1(4298.91,3757.58) 4298.91,3756.86 4487.54,3568.23 4487.54,3535.23 v1(4508.03,3514.74) 4547.72,3514.74 SIM1.7
GPIO45: R9.1 SIM1.8 U1.51 | length 456
  Top Layer w5: v1(4299.21,3787.81) 4301.35,3787.81 4325.93,3763.24 U1.51 ; R9.1 4485.71,3581 v1(4508.03,3558.68)
  Bottom Layer w5: v1(4299.21,3787.81) 4299.21,3786.25 4497.99,3587.47 4497.99,3568.72 v1(4508.03,3558.68) 4548.35,3558.68 SIM1.8
GPIO46: U1.52
GPIO47: U1.37
GPIO48: U1.36
LCD_LEDK: FPC1.17 R13.2 | length 240
  Top Layer w5: R13.2 3857.48,3600.05 3857.48,3745.56 3874.7,3762.77 FPC1.17
SPICLK: U1.33 U2.6 | length 60.8
  Top Layer w5: U1.33 4161.46,3573.23 U2.6
SPICS0: U1.32 U2.1 | length 456.5
  Top Layer w5: v1(4056.68,3348.09) 4081.66,3323.11 U2.1 ; U1.32 4145.71,3629.63 v1(4152.64,3636.55)
  Bottom Layer w5: v1(4056.68,3348.09) 4056.68,3599.81 4113.91,3657.04 4130.88,3657.04 4151.37,3636.55 v1(4152.64,3636.55)
SPID: U1.35 U2.5 | length 68.5
  Top Layer w5: U1.35 4192.95,3591.74 U2.5
SPIHD: U1.30 U2.7 | length 59.7
  Top Layer w5: U1.30 4114.21,3570.48 U2.7
SPIQ: U1.34 U2.2 | length 617.2
  Top Layer w5: v1(4108.47,3348.09) 4131.66,3324.9 U2.2 ; U1.34 4177.21,3629.67 v1(4184.77,3637.22)
  Bottom Layer w5: v1(4108.47,3348.09) 4082.36,3321.99 4053.8,3321.99 4036.18,3339.6 4036.18,3603.09 4099.15,3666.06 4152.11,3666.06 4180.95,3637.22 v1(4184.77,3637.22)
SPIWP: U1.31 U2.3 | length 423.5
  Top Layer w5: v1(4122.39,3636.55) 4122.39,3635.34 4129.96,3627.77 U1.31 ; v1(4164.69,3348.92) 4181.66,3331.95 U2.3
  Bottom Layer w5: v1(4122.39,3636.55) 4074.33,3588.49 4074.33,3432.2 4156.44,3350.1 4163.51,3350.1 v1(4164.69,3348.92)
TS: R14.2 U4.31 | length 162.7
  Top Layer w5: R14.2 3519.31,3856.93 3593.86,3782.38 U4.31
U0RXD: U1.50
U0TXD: U1.49
USB_DN_IN: D1.4 USB1.A7 USB1.B7 | length 630.8
  Top Layer w8: USB1.B7@3465.08,3644.67 3464.49,3645.25 3417.61,3645.25 3405.81,3633.45 3405.81,3616.9 3417.51,3605.19 3464.98,3605.19 3465.08,3605.3 3489.74,3605.3 3517.21,3577.83 3525.21,3577.83 3532.32,3584.94 3540.32,3584.94 3546.46,3578.8 3546.46,3570.8 3539.35,3563.69 3539.35,3555.69 3545.49,3549.55 3553.49,3549.55 3560.6,3556.66 3568.6,3556.66 3574.74,3550.51 3574.74,3542.51 3567.63,3535.41 3567.63,3527.41 3642.64,3452.4 3642.64,3374.19 3680.79,3336.04 3732.68,3336.04 D1.4
USB_DP_IN: D1.6 USB1.A6 USB1.B6 | length 630.2
  Top Layer w8: v3(3425.79,3585.02) 3464.49,3585.02 3465.08,3585.61 3489.63,3585.61 3628.64,3446.6 3628.64,3307.88 3674.02,3262.5 D1.6 ; v3(3425.79,3625.18) 3425.99,3624.98 USB1.A6@3465.08,3624.98
  Bottom Layer w8: v3(3425.79,3585.02) 3415.75,3585.02 3405.71,3595.06 3405.71,3613.13 3417.76,3625.18 v3(3425.79,3625.18)
VBUS: C17.2 D1.5 U4.37 USB1.A4B9 USB1.B4A9 | length 990.4
  Top Layer w8: C17.2 3568.83,3663.66 3593.05,3687.89 U4.37 ; v1(3570.84,3615.93) 3570.84,3571.41 3656.69,3485.55 3656.69,3392.26 3686.81,3362.14 3757.09,3362.14 3769.14,3350.1 3769.14,3321.99 3747.05,3299.9 D1.5
  Top Layer w10: USB1.B4A9@3465.08,3514.75 3490.53,3514.75 3502.34,3526.56 USB1.B4A9@3465.08,3526.56 ; USB1.A4B9@3465.08,3703.72 3466.97,3705.61 v1(3502.84,3705.61) 3492.92,3715.53 USB1.A4B9@3465.08,3715.53 ; C17.2 3570.84,3653.28 v1(3570.84,3615.93)
  Bottom Layer w10: v1(3502.84,3705.61) 3502.84,3615.08 ; v1(3503.34,3521.53) 3502.84,3522.02 3502.84,3615.08 ; v1(3570.84,3615.93) 3569.99,3615.08 3502.84,3615.08
VDD3V3: C1.2 C2.2 C3.2 C5.2 C6.2 C7.2 C8.2 C12.2 C14.2 C15.2 C25.2 C26.2 C27.2 C28.2 FPC1.2 FPC1.15 FPC1.16 L1.1 L2.2 MIC1.1 R1.2 R2.2 R3.2 R6.2 R7.2 R8.2 R9.2 R10.2 R11.2 SIM1.4 U1.20 U1.46 U1.55 U1.56 U4.21 | length 1889.4
  Top Layer w8: 3791.44,3884.74 3795.83,3880.36 U4.21 ; FPC1.15 3915.55,3723.4 v1(3925.75,3733.6) 3916.26,3743.09 FPC1.16 ; U1.20 4097.95,3763.24 v1(4098.43,3763.72) ; U1.46 4354.34,3684.5 4379.53,3659.31 C6.2 ; U1.55 4371.22,3826.24 v1(4375.51,3821.95) ; U1.56 4398.91,3841.98
  Top Layer w10: FPC1.2 3920.79,3467.5 v1(3923.74,3464.55)
  Top Layer w20: C27.2 3985.01,3884.74 C28.2 C5.2 4061.81,3895.76 v1(4062.29,3896.24) v1(4080.36,3914.31) ; v1(4056.26,4093.01) R3.2 4093.43,4155.81 C15.2 C14.2 4152.64,4156.79 C1.2 4188.3,4107.54 4206.38,4089.47 C2.2 4206.38,4070.97 4218.42,4058.92 C3.2 4218.42,4030.81 4228.94,4020.29 L1.1 4227.44,3991.59 R2.2 ; v1(4148.62,4020.33) R1.2 R2.2@4186.77,3991.59 ; v1(4375.51,3821.95) v1@4378.88,3821.95 ; C6.2 4430.28,3581.48 R9.2 R10.2 R11.2 ; v1(4389.57,3492.66) R11.2 ; v1(4390.74,3362.14) R7.2 ; 4398.91,3841.98 v1@4378.88,3821.95 ; C8.2 4406.81,3849.58 C7.2 4415.67,3803.88 v1(4401.62,3803.88) 4383.55,3821.95 v1@4378.88,3821.95 ; v1(4429.73,3283.84) 4430.76,3284.87 R8.2 R7.2 ; R7.2 R6.2 R11.2
  Top Layer w30: L2.2 3781.89,3884.74 3791.44,3884.74 C25.2 C26.2 C27.2
  Bottom Layer w20: v1(4506.03,3394.27) 4514.06,3386.24 4549.14,3386.24 SIM1.4
  other v1: 3979.94,4157.94
VDD_SPI: C29.2 C30.2 U1.29 U2.8 | length 495.2
  Top Layer w5: U1.29 4098.47,3569.86 U2.8 4036.18,3507.57 4036.18,3301.91 4065.23,3272.86 4124.54,3272.86 C29.2@4141.67,3255.73
  Top Layer w20: C29.2 C30.2
VREF: C18.2 U4.2 | length 100
  Top Layer w8: U4.2 3669.84,3551.32 C18.2
VRTC: C16.2 C24.2 U4.28 U5.8 | length 479.9
  Top Layer w5: U4.28 3682.26,3813.27 3682.26,3826.9 3651.8,3857.36 3630.5,3857.36 3613.34,3874.52 C24.2 3622.22,3891.09 3655.22,3891.09 3662.72,3898.58 3662.72,4042.81 3697.09,4077.19 U5.8
  Top Layer w20: C16.2 C24.2
VSYS: C19.2 C20.2 C21.2 U4.23 U4.34 U4.36 | length 507.7
  Top Layer w5: U4.34 3639.03,3735.13 3651.53,3747.63 3651.53,3778.44 cw(c3658.03,3778.44) 3658.03,3784.94 3750.15,3784.94 3764.33,3799.12 U4.23 3764.33,3823.57 3753.72,3834.17 3688.58,3834.17 3647.06,3875.68 C21.2
  Top Layer w8: C20.2 3625.8,3734.4 U4.34 ; C19.2 3577.02,3703.64 U4.36
  Top Layer w20: C20.2 3568.83,3733.98 C19.2
XTAL_N: C9.1 U1.53 X1.3 | length 200.7
  Top Layer w5: U1.53 4348.26,3794.74 4376.48,3766.52 4376.48,3720.72 4395.59,3701.61 C9.1 4436.61,3659.98 X1.3
XTAL_P: C10.2 U1.54 X1.1 | length 238.9
  Top Layer w5: U1.54 4348.26,3810.49 4382.98,3775.77 4481.45,3775.77 4530.31,3726.91 X1.1
pads on no net: FPC1.19 FPC1.20 KEY_DWN1.3 KEY_DWN1.4 KEY_PWR1.3 KEY_PWR1.4 KEY_RST1.3 KEY_RST1.4 U1.28 U1.38 U1.39 U1.40 U1.41 U1.42 U3.2 U4.1 U4.4 U4.5 U4.6 U4.7 U4.8 U4.9 U4.10 U4.11 U4.12 U4.13 U4.14 U4.15 U4.16 U4.17 U4.18 U4.19 U4.20 U4.24 U4.25 U4.26 U4.27 U4.32 U4.35 U5.3 U5.7 USB1.A8 USB1.B8

## Polygon pours and split planes (outlines as drawn)
GND on Top Layer (hatched 45Degree grid 10 track 5, remove dead copper, pour order 0): 3225,4231.55 3225,3000.73 4608.43,3000.73 4608.43,4231.55
GND on Bottom Layer (hatched 45Degree grid 10 track 5, remove dead copper, pour order 4): 3227.01,4232.74 3227.01,3001.92 4610.44,3001.92 4610.44,4232.74

## Keep-outs
Board Outline Layer:
  region: 4627.04,3775.22 ccw(c4682.72,3830.9) 4738.4,3775.22 4830.53,3867.35 ccw(c4774.85,3923.03) 4830.53,3978.71 4375.38,4433.86 ccw(c4319.7,4378.18) 4264.02,4433.86 4171.89,4341.73 ccw(c4227.57,4286.05) 4171.89,4230.37
  lines w10: 3225,3203.12 3225,4029.89 cw(c3421.85,4029.89) 3421.85,4226.74 4406.1,4226.74 cw(c4406.1,4029.89) 4602.95,4029.89 4602.95,3203.12 cw(c4406.1,3203.12) 4406.1,3006.26 4332.45,3006.26 4332.45,3037.37 3495.59,3037.37 3495.59,3006.26 3421.85,3006.26 cw(c3421.85,3203.12) 3225,3203.12

## Other copper
Top Layer:
  region net VDD3V3: 4321.89,3822.3 4321.89,3846.04 4394.85,3846.04 4398.91,3841.98 4378.88,3821.95 4375.51,3821.95 4375.16,3822.3
  region net VDD3V3: 4406.51,3849.58 4406.81,3849.58 4434.09,3822.3 4415.67,3803.88 4401.62,3803.88 4383.55,3821.95 4378.88,3821.95
  region net VDD3V3: 3795.83,3797.87 3795.83,3880.36 3805.44,3870.75 3823.65,3870.75 3823.65,3825.69
  region net VDD3V3: 3868.97,3743.09 3868.97,3723.4 3921.57,3723.4 3921.57,3743.09

## Silkscreen, mask and mechanical layers (free items; w line width, h text height)
Top Silkscreen Layer:
  text "+" at 3353.51,3886.2 h80
Bottom Silkscreen Layer:
  drawing of 82 lines, arcs and shapes, not listed
  text "时笺" at 3791.22,3952.46 h200
  text "Pulse" at 4355.44,3629.19 h300